# EAGLE board three_relay_display_v1 (EAGLE 5.10)
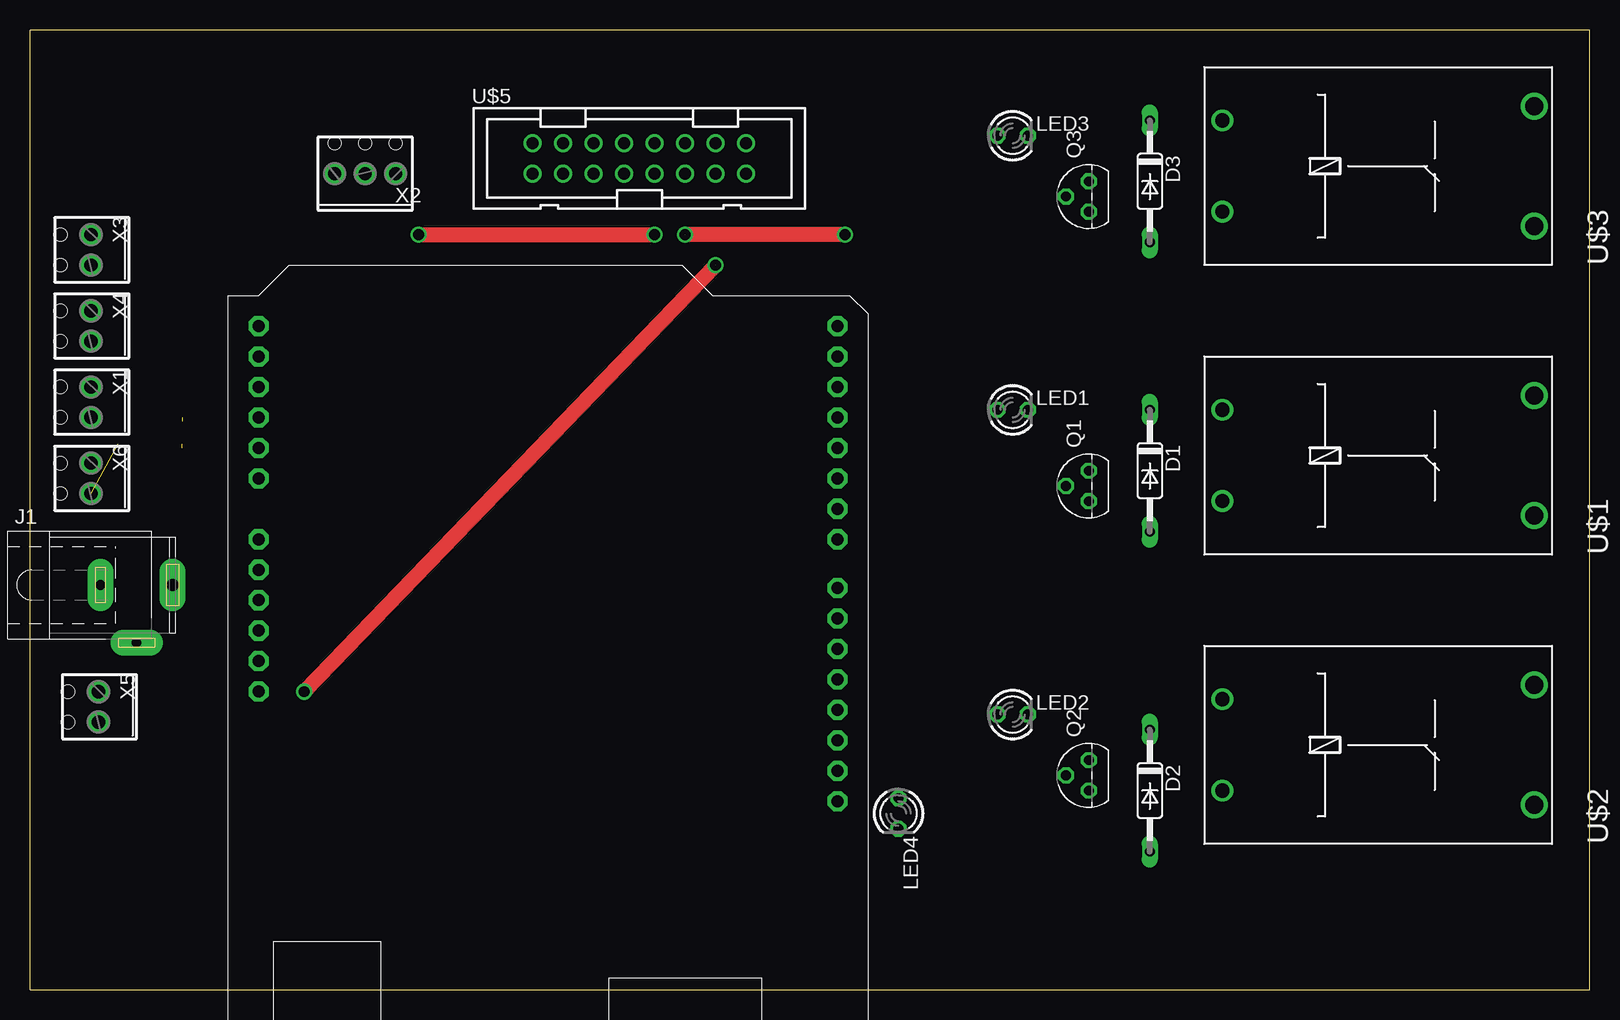
[diagram p0: board, top side]
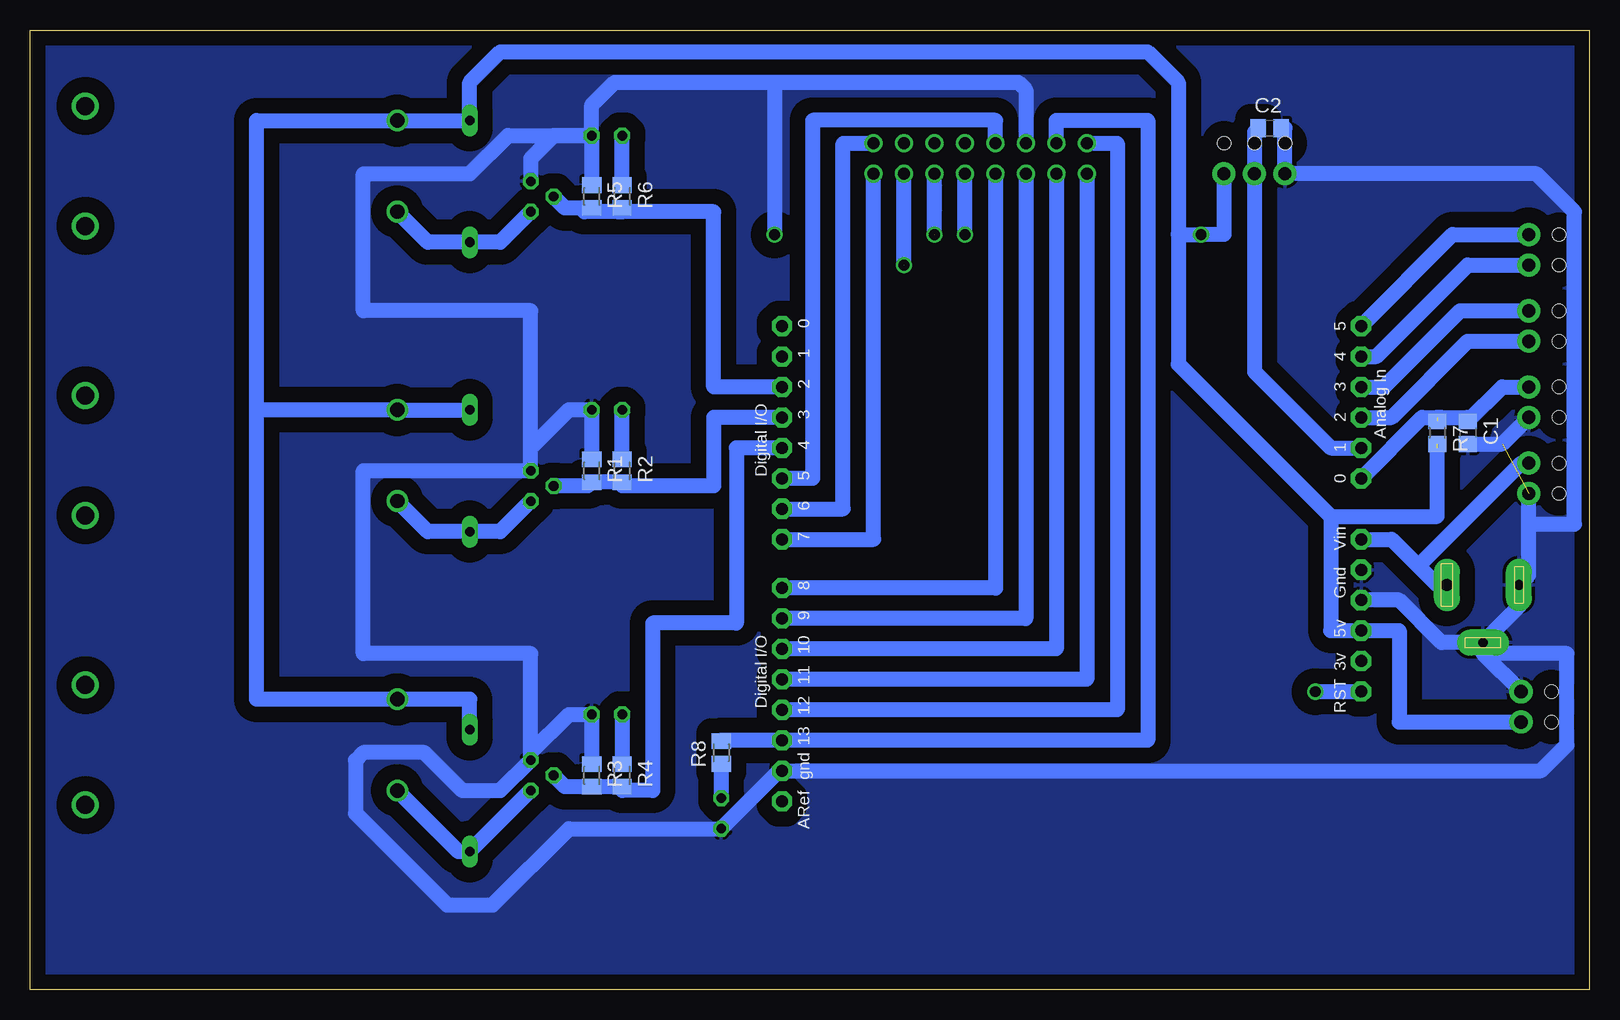
[diagram p1: board, bottom side, seen from below]

Size 130 x 80 mm. Coordinates in mm from the lower left corner, seen from the top.
Outline: 0,0 130,0 130,80 0,80 0,0
Copper layers (1*16): Top 0.035mm / dielectric 1.5mm / Bottom 0.035mm
Design rules "default": minimum track width 10mil, minimum drill 24mil, track to track 8mil, track to pad 8mil, pad to pad 8mil, via to via 8mil, smd to smd 8mil, copper to edge 40mil, drill to drill 8mil, minimum pad ring 10mil, minimum via ring 8mil, stop-mask expansion 4mil, vias tented up to drill 0mil, thermal gap 10mil

## Footprints (pad centres in the part's own frame; a part is rotated, then mirrored left to right if it is on the bottom)
C0805 = smd 1.3 x 1.5: 1 -0.95,0; 2 0.95,0
DO35-10 = drill 0.813 long: A 5.08,0; C -5.08,0
SPC4078 = drill 0.8 pad 2.184 long: 1 -3,0; 2 0,-4.8 | drill 1 pad 2.184 long: 3 3,0
LED3MM = drill 0.813 octagon: A -1.27,0; K 1.27,0
TO92 = drill 0.813 octagon: 1 1.27,0; 2 0,1.905; 3 -1.27,0
M0805 = smd 1.3 x 1.6: 1 -0.95,0; 2 0.95,0
R0805 = smd 1.3 x 1.5: 1 -0.95,0; 2 0.95,0
OZF = drill 1.2 round: 1 -13,-3.8; 2 -13,3.8 | drill 1.5 round: N/C 13,5; N/C-2 13,-5
ARDUINO-NOHOLE = drill 1 pad 1.676 octagon: 3V 35.56,2.54; 5V 38.1,2.54; A0 50.8,2.54; A1 53.34,2.54; A2 55.88,2.54; A3 58.42,2.54; A4 60.96,2.54; A5 63.5,2.54; AREF 23.876,50.8; D0 63.5,50.8; D1 60.96,50.8; D2 58.42,50.8; D3 55.88,50.8; D4 53.34,50.8; D5 50.8,50.8; D6 48.26,50.8; D7 45.72,50.8; D8 41.656,50.8; D9 39.116,50.8; D10 36.576,50.8; D11 34.036,50.8; D12 31.496,50.8; D13 28.956,50.8; GND 26.416,50.8; GND1 43.18,2.54; GND2 40.64,2.54; RESET 33.02,2.54; VIN 45.72,2.54
PAK100/2500-16 = drill 1 pad 1.422 round: 1 -8.89,-1.27; 2 -8.89,1.27; 3 -6.35,-1.27; 4 -6.35,1.27; 5 -3.81,-1.27; 6 -3.81,1.27; 7 -1.27,-1.27; 8 -1.27,1.27; 9 1.27,-1.27; 10 1.27,1.27; 11 3.81,-1.27; 12 3.81,1.27; 13 6.35,-1.27; 14 6.35,1.27; 15 8.89,-1.27; 16 8.89,1.27
2POL254 = drill 1.1 pad 1.93 round: 1 -1.27,0; 2 1.27,0 | hole 1.1: -1.27,-2.54; 1.27,-2.54
3POL254 = drill 1.1 pad 1.93 round: 1 -2.54,0; 2 0,0; 3 2.54,0 | hole 1.1: -2.54,-2.54; 0,-2.54; 2.54,-2.54

## Placement (x,y rotation side)
C1  [C0805]  10.15,46.43 270 bottom
C2  [C0805]  26.66,71.83 0 bottom
D1  1N4148DO35-10  [DO35-10]  93.34,43.26 270 top
D2  1N4148DO35-10  [DO35-10]  93.34,16.59 270 top
D3  1N4148DO35-10  [DO35-10]  93.34,67.38 270 top
J1  [SPC4078]  8.88,33.73 0 top
LED1  [LED3MM]  81.91,48.34 0 top
LED2  [LED3MM]  81.91,22.94 0 top
LED3  [LED3MM]  81.91,71.19 0 top
LED4  [LED3MM]  72.38,14.68 270 top
Q1  BS107AG  [TO92]  88.25,41.98 90 top
Q2  BS107AG  [TO92]  88.25,17.86 90 top
Q3  BS107AG  [TO92]  88.25,66.11 90 top
R1  10k  [M0805]  83.17,43.26 270 bottom
R2  10k  [M0805]  80.64,43.26 270 bottom
R3  10k  [M0805]  83.17,17.86 270 bottom
R4  10k  [M0805]  80.64,17.86 270 bottom
R5  10k  [M0805]  83.17,66.11 270 bottom
R6  10k  [M0805]  80.64,66.11 270 bottom
R7  [R0805]  12.69,46.43 270 bottom
R8  10k  [M0805]  72.38,19.76 90 bottom
U$1  OZF-S-105LM1P  [OZF]  112.38,44.52 0 top
U$2  OZF-S-105LM1P  [OZF]  112.38,20.39 0 top
U$3  OZF-S-105LM1P  [OZF]  112.38,68.66 0 top
U$4  ARDUINO-NOHOLE  [ARDUINO-NOHOLE]  16.5,-8.18 90 bottom
U$5  QO-DISPLAY-ADAPTER  [PAK100/2500-16]  50.79,69.29 0 top
X1  [2POL254]  5.07,48.97 270 top
X2  [3POL254]  27.93,68.02 180 top
X3  [2POL254]  5.07,61.67 270 top
X4  [2POL254]  5.07,55.32 270 top
X5  [2POL254]  5.7,23.57 270 top
X6  [2POL254]  5.07,42.62 270 top

## Library data of the parts
C1 C2 R7 = rcl
D1-D3 = diode
J1 = con-jack
LED1-LED4 = led
Q1-Q3 = transistor-fet
R1-R6 R8 U$1-U$5 X1-X6 = MEL_Components

## Nets
3V: U$4.3V
+5V: D1.C D2.C D3.C R7.2 U$1.2 U$2.2 U$3.2 U$4.5V U$5.9 X2.1 X5.2
+12V: J1.3 U$4.VIN X6.1
GND: C1.2 C2.2 J1.1 J1.2 LED1.K LED2.K LED3.K LED4.K Q1.1 Q2.1 Q3.1 R1.1 R3.1 R5.1 U$4.GND U$4.GND1 U$4.GND2 U$5.6 U$5.11 X1.2 X2.3 X5.1 X6.2
N$1: LED1.A R2.1
N$2: D1.A Q1.3 U$1.1
N$3: Q1.2 R1.2 R2.2 U$4.D3
N$4: D2.A Q2.3 U$2.1
N$5: Q2.2 R3.2 R4.2 U$4.D4
N$6: LED2.A R4.1
N$7: D3.A Q3.3 U$3.1
N$8: U$4.A5 X3.1
N$9: LED3.A R6.1
N$10: C1.1 R7.1 U$4.A0 X1.1
N$11: C2.1 U$4.A1 X2.2
N$12: LED4.A R8.1
N$13: U$4.D8 U$5.7
N$14: U$4.D6 U$5.16
N$15: U$4.D10 U$5.3
N$16: U$4.D12 U$5.2
N$17: U$4.D11 U$5.1
N$18: Q3.2 R5.2 R6.2 U$4.D2
N$19: U$4.D9 U$5.5
N$20: U$4.D7 U$5.15
N$22: U$4.D5 U$5.8
N$23: U$4.A4 X3.2
N$24: U$4.A3 X4.1
N$25: U$4.A2 X4.2
N$26: R8.2 U$4.D13 U$5.4
VCC: U$4.RESET U$5.13

## Tracks (layer width: path | path; a pad name or v marks a point on that pad's centre or on a via)
+5V  (via drill 0.6)  (1 unrouted)
  Top 1.27: v32.38,62.94 v52.06,62.94
  Bottom 1.27: 111.11,48.34 111.11,72.45 U$3.2 D3.C 93.34,75.64 90.8,78.18 36.82,78.18 34.28,75.64 34.28,62.94 | 111.11,48.34 99.39,48.34 U$1.2 93.34,48.33 D1.C | 111.11,48.34 111.11,24.2 U$2.2 93.34,24.2 D2.C | X5.2 15.86,22.3 15.86,29.92 U$4.5V 21.58,29.92 21.58,39.45 | 21.58,39.45 12.69,39.45 12.69,45.16 | 34.28,62.94 34.28,52.14 21.58,39.45 | v52.06,62.94 U$5.9 | 34.28,62.94 v32.38,62.94 30.47,62.94 X2.1
+12V
  Bottom 1.27: J1.3 12.69,33.73 14.28,35.32 | 14.28,35.32 16.5,37.54 U$4.VIN | X6.1 5.7,43.89 14.28,35.32
GND  (via drill 0.6)  (2 unrouted)
  Top 1.27: v67.94,62.94 54.6,62.94
  Bottom 1.27: R3.1 LED2.K 85.08,22.94 88.25,19.76 Q2.1 | R1.1 LED1.K 85.08,48.34 88.25,45.16 | 88.25,45.16 Q1.1 102.22,43.26 102.22,28.02 88.25,28.02 Q2.1 | LED3.K R5.1 | LED3.K 86.35,71.19 88.25,69.29 Q3.1 | LED3.K 90.16,71.19 93.34,68.02 102.22,68.02 102.22,56.59 88.25,56.59 88.25,45.16 | 54.6,62.94 U$5.11 | C2.2 25.39,71.83 X2.3 4.44,68.02 1.26,64.84 1.26,38.81 5.07,38.81 | C1.2 7.29,45.48 X1.2 | 5.07,38.81 5.07,34.54 J1.1 5.88,31.93 J1.2 | 5.07,38.81 X6.2 | J1.2 12.33,28.93 15.86,32.46 U$4.GND2 | 8.88,28.02 J1.2 | 8.88,28.02 X5.1 | Q2.1 90.8,16.59 93.97,16.59 97.14,19.76 102.22,19.76 102.86,19.12 102.86,14.68 95.24,7.06 91.43,7.06 85.08,13.41 LED4.K 67.55,18.24 U$4.GND 4.05,18.24 1.89,20.39 1.89,28.02 8.88,28.02 | 67.94,75.64 81.27,75.64 83.17,73.73 LED3.K | U$5.6 46.98,75 47.62,75.64 67.94,75.64 | 67.94,75.64 v67.94,62.94
  pour Bottom (isolate 1.27): -0.01,80.09 130.16,80.09 130.16,0.08 -0.01,0.08
N$1
  Bottom 1.27: R2.1 LED1.A
N$2
  Bottom 1.27: Q1.3 90.8,38.17 D1.A 96.84,38.17 U$1.1
N$3
  Bottom 1.27: U$4.D3 73.02,47.7 73.02,41.98 80.64,41.98 R2.2 R1.2 83.5,41.98 Q1.2
N$4
  Bottom 1.27: Q2.3 D2.A 94.3,11.5 U$2.1
N$5
  Bottom 1.27: Q2.2 85.4,16.91 R3.2 R4.2 80.64,16.59 78.09,16.59 78.09,30.55 71.11,30.55 71.11,45.16 U$4.D4
N$6
  Bottom 1.27: LED2.A R4.1
N$7
  Bottom 1.27: Q3.3 90.8,62.3 D3.A 96.84,62.3 U$3.1
N$8
  Bottom 1.27: U$4.A5 11.42,62.94 X3.1
N$9
  Bottom 1.27: R6.1 LED3.A
N$10  (1 unrouted)
  Bottom 1.27: X1.1 7.29,50.24 C1.1 10.15,47.7 12.37,47.7 R7.1 | U$4.A0 13.96,47.7 12.69,47.7
N$11
  Bottom 1.27: C2.1 27.93,71.51 X2.2 27.93,51.51 21.58,45.16 U$4.A1
N$12
  Bottom 1.27: R8.1 LED4.A
N$13
  Bottom 1.27: U$4.D8 49.52,33.48 U$5.7
N$14
  Bottom 1.27: U$4.D6 62.22,40.08 62.22,70.56 U$5.16
N$15
  Bottom 1.27: U$4.D10 44.44,28.4 U$5.3
N$16
  Bottom 1.27: U$4.D12 39.36,23.32 39.36,70.56 U$5.2
N$17
  Bottom 1.27: U$4.D11 41.9,25.86 U$5.1
N$18
  Bottom 1.27: Q3.2 85.4,65.16 R5.2 83.49,65.16 83.81,64.84 80.95,64.84 R6.2 80.64,64.84 73.02,64.84 73.02,50.24 U$4.D2
N$19
  Bottom 1.27: U$4.D9 46.98,30.94 U$5.5
N$20
  Bottom 1.27: U$4.D7 59.68,37.54 U$5.15
N$21  (via drill 0.9)
  other vias: 57.14,60.4
N$22
  Bottom 1.27: U$4.D5 64.76,42.62 64.76,72.47 49.52,72.47 U$5.8
N$23
  Bottom 1.27: X3.2 10.15,60.4 17.77,52.78 U$4.A4
N$24
  Bottom 1.27: X4.1 10.78,56.59 17.13,50.24 U$4.A3
N$25
  Bottom 1.27: U$4.A2 16.5,47.7 10.15,54.05 X4.2
N$26
  Bottom 1.27: U$5.4 44.44,72.47 36.82,72.47 36.82,20.78 U$4.D13 72.38,20.78 R8.2
N$27  (via drill 0.9)
  other vias: 54.6,62.94
N$28  (via drill 0.9)
  other vias: 67.94,62.94
N$29  (via drill 0.9)
  other vias: 22.85,24.84
N$30  (via drill 0.9)
  other vias: 32.38,62.94
N$31  (via drill 0.9)
  other vias: 52.06,62.94
VCC  (via drill 0.9)  (1 unrouted)
  Top 1.27: 57.14,60.4 v22.85,24.84
  Bottom 1.27: 57.14,60.4 U$5.13 | v22.85,24.84 U$4.RESET